# EAGLE board piggyback (EAGLE 6.5.0)
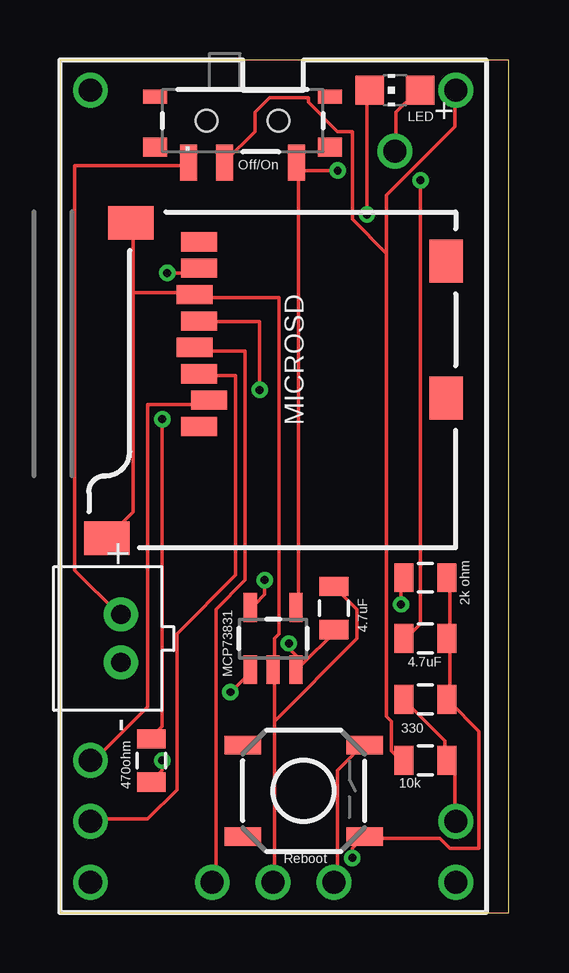
[diagram p0: board, top side]
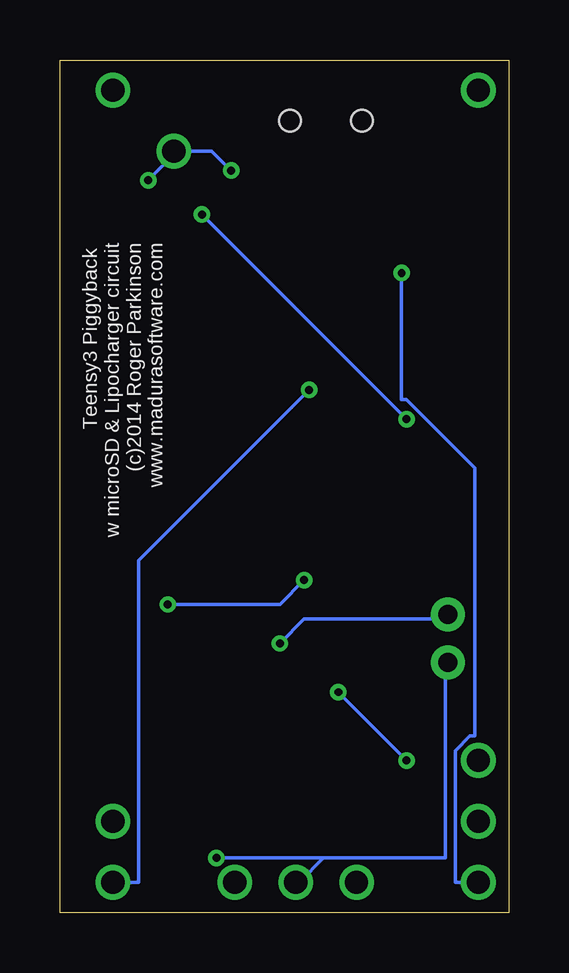
[diagram p1: board, bottom side, seen from below]

Size 18.72 x 35.55 mm. Coordinates in mm from the lower left corner, seen from the top.
Outline: 0,0 18.72,0 18.72,35.55 0,35.55 0,0
Copper layers (1*16): Top 0.0356mm / dielectric 1.5011mm / Bottom 0.0356mm
Design rules "LaenPCBOrder": minimum track width 6mil, minimum drill 13mil, track to track 6mil, track to pad 6mil, pad to pad 6mil, via to via 6mil, smd to smd 6mil, copper to edge 15mil, drill to drill 6mil, minimum pad ring 7mil, minimum via ring 7mil, stop-mask expansion 4mil, vias tented up to drill 0mil, thermal gap 10mil

## Footprints (pad centres in the part's own frame; a part is rotated, then mirrored left to right if it is on the bottom)
TEENSY_3.0+4-PIGGYBACK = drill 0.965: 3.3V1 -2.54,-16.51; 10 -7.62,-11.43; 11 -7.62,-13.97; 12 -7.62,-16.51; 13 7.62,-16.51; 14/A0 7.62,-13.97; GND -7.62,16.51; GND1 0,-16.51; PGM 2.54,-16.51; VIN 7.62,16.51; VUSB 5.08,13.97
0805 = smd 0.8 x 1.2: 1 -0.9,0; 2 0.9,0
JST-PH-2-THM = drill 0.8 pad 1.422: 1 1,0; 2 -1,0
CHIP-LED0805 = smd 1.2 x 1.2: A 0,-1.05; C 0,1.05
SOT23-5 = smd 0.55 x 1.2: 1 -0.95,-1.3; 2 0,-1.3; 3 0.95,-1.3; 4 0.95,1.3; 5 -0.95,1.3
MICRO-SD-SOCKET-PP = smd 0.8 x 1.5: 1 -8.94,10.7; 2 -7.84,10.3; 3 -6.74,10.7; 4 -5.64,10.9; 5 -4.54,10.7; 6 -3.44,10.9; 7 -2.34,10.7; 8 -1.24,10.7 | smd 1.8 x 1.4: CD1 -2.05,0.4; CD2 -7.75,0.4 | smd 1.4 x 1.9: GND1 -13.6,14.55; GND3 -0.45,13.55
TACTILE_SWITCH_SMD = smd 1.524 x 0.762: 1 -2.54,1.905; 2 2.54,1.905; 3 -2.54,-1.905; 4 2.54,-1.905
SWITCH-SPST-SMD-A = smd 0.7 x 1.5: 1 -2.25,-1.75; 2 -0.75,-1.75; 3 2.25,-1.75 | smd 1 x 0.6: GND1 -3.65,1; GND3 3.65,1 | smd 1 x 0.8: GND2 -3.65,-1.1; GND4 3.65,-1.1 | hole 0.9: -1.5,0; 1.5,0

## Placement (x,y rotation side)
.  TEENSY_3.0+4-PIGGYBACK  [TEENSY_3.0+4-PIGGYBACK]  8.89,17.78 0 top
C1  4.7uF  [0805]  11.43,12.7 90 top
C2  4.7uF  [0805]  15.24,11.43 0 top
CN1  Battery  [JST-PH-2-THM]  2.54,11.43 90 top
LED  LED  [CHIP-LED0805]  13.97,34.29 90 top
MCP73831  [SOT23-5]  8.89,11.43 0 top
MICROSD  USD-SOCKETNEW  [MICRO-SD-SOCKET-PP]  16.51,29.21 90 top
R1  470ohm  [0805]  3.81,6.35 270 top
R2  2k ohm  [0805]  15.24,13.97 0 top
R3  10k  [0805]  15.24,6.35 0 top
R5  330  [0805]  15.24,8.89 0 top
S1  Reboot  [TACTILE_SWITCH_SMD]  10.16,5.08 0 top
S3  Off/On  [SWITCH-SPST-SMD-A]  7.62,33.02 0 top

## Library data of the parts
. = Teensy3.0
C1 C2 MCP73831 R1 R2 = SparkFun
CN1 LED = adafruit
MICROSD = SparkFun-Connectors
R3 R5 = SparkFun-Resistors
S1 = SparkFun-Electromechanical; PROD_ID: SWCH-08247
S3 = SparkFun-Electromechanical

## Nets
DI: ..11 MICROSD.3
DO: ..12 MICROSD.7
GND: ..GND1 C1.2 C2.2 CN1.2 MCP73831.2 MICROSD.6 MICROSD.GND1 MICROSD.GND3 R2.2 R5.2 S1.4
N$1: MCP73831.5 R2.1
N$3: C1.1 CN1.1 MCP73831.3 S3.1
N$4: LED.C R1.1
N$5: MCP73831.1 R1.2
N$6: ..VUSB C2.1 LED.A MCP73831.4 S3.3
N$7: ..PGM S1.2
N$8: ..VIN R3.1 S3.2
N$9: ..3.3V1 MICROSD.4
N$10: ..14/A0 R3.2 R5.1
N$12: ..13 MICROSD.5
N$14: ..10 MICROSD.2

## Tracks (layer width: path | path; a pad name or v marks a point on that pad's centre or on a via)
DI
  Top 0.152: MICROSD.3 5.89,22.4 7.32,22.4 7.32,14.07 4.88,11.63 4.88,5.13 3.66,3.91 1.42,3.91 ..11
DO  (via drill 0.33)
  Top 0.152: v4.47,26.67 5.69,26.67 MICROSD.7
  Bottom 0.152: v4.47,26.67 4.47,21.39 4.27,21.39 1.42,18.54 1.42,7.37 1.63,7.37 2.23,6.76 2.23,1.27 ..12
GND  (via drill 0.33)
  Top 0.152: 3.05,25.86 5.49,25.86 MICROSD.6 5.69,25.65 9.14,25.65 9.14,11.63 8.94,11.43 8.94,10.21 MCP73831.2 8.94,10.01 8.94,7.98 | 3.05,25.86 3.05,28.7 MICROSD.GND3 | 3.05,25.86 3.05,16.71 2.03,15.7 MICROSD.GND1 | 16.26,11.43 16.26,8.99 R5.2 16.26,8.79 17.48,7.57 17.48,2.69 16.26,2.69 15.85,3.1 12.8,3.1 S1.4 12.6,3.1 12.19,2.69 v12.19,2.29 | 16.26,11.43 16.26,13.87 R2.2 | 16.26,11.43 C2.2 | 8.94,7.98 8.94,1.27 ..GND1 | 8.94,7.98 12.39,11.43 12.39,12.65 11.58,13.46 C1.2
  Bottom 0.152: 7.72,2.29 2.64,2.29 2.64,10.41 CN1.2 | 7.72,2.29 8.74,1.27 ..GND1 | 7.72,2.29 v12.19,2.29
N$1  (via drill 0.33)
  Top 0.152: v8.53,13.87 8.53,13.26 8.13,12.85 MCP73831.5 | v14.22,12.85 14.22,13.87 R2.1
  Bottom 0.152: v8.53,13.87 9.55,12.85 v14.22,12.85
N$3  (via drill 0.33)
  Top 0.152: 10.16,10.41 11.38,11.63 C1.1 | 10.16,10.41 9.96,10.21 MCP73831.3 | S3.1 5.28,31.14 0.61,31.14 0.61,14.27 2.44,12.45 CN1.1 | 10.16,10.41 9.55,11.02 v9.55,11.23
  Bottom 0.152: v9.55,11.23 8.53,12.24 2.64,12.24 CN1.1
N$4  (via drill 0.33)
  Top 0.152: v4.27,20.57 4.27,7.77 3.86,7.37 R1.1 | v12.8,29.11 12.8,34.19 LED.C
  Bottom 0.152: v12.8,29.11 v4.27,20.57
N$5  (via drill 0.33)
  Top 0.152: v4.27,6.35 4.27,5.94 3.86,5.54 R1.2 | v7.11,9.2 7.92,10.01 MCP73831.1
  Bottom 0.152: v7.11,9.2 v4.27,6.35
N$6  (via drill 0.33)
  Top 0.152: 9.96,30.94 9.96,31.14 S3.3 9.96,30.94 | 9.96,30.94 9.96,12.85 MCP73831.4 | v15.04,30.53 15.04,12.04 14.43,11.43 C2.1 | LED.A 14.83,34.19 14.02,33.38 14.02,31.75 ..VUSB | v11.58,30.94 9.96,30.94
  Bottom 0.152: 13.82,31.75 v15.04,30.53 | v11.58,30.94 12.39,31.75 13.82,31.75 | 13.82,31.75 ..VUSB
N$7
  Top 0.152: S1.2 12.6,6.96 11.58,5.94 11.58,1.27 ..PGM
N$8
  Top 0.152: 13.61,27.48 13.61,29.92 16.46,32.77 16.46,34.19 ..VIN | 13.61,27.48 13.61,8.18 13.82,7.98 13.82,6.76 14.22,6.35 R3.1 | 13.61,27.48 12.19,28.91 12.19,32.56 11.58,32.56 10.36,33.78 10.36,33.98 8.74,33.98 8.13,33.38 8.13,32.56 6.91,31.34 S3.2
N$9
  Top 0.152: MICROSD.4 5.69,23.42 7.72,23.42 7.72,13.87 6.5,12.65 6.5,1.27 ..3.3V1
N$10
  Top 0.152: ..14/A0 16.46,3.91 16.46,6.15 16.26,6.35 R3.2 16.05,6.35 16.05,7.16 14.43,8.79 R5.1
N$12  (via drill 0.33)
  Top 0.152: v8.33,21.79 8.33,24.64 5.89,24.64 MICROSD.5
  Bottom 0.152: v8.33,21.79 15.44,14.68 15.44,1.27 ..13
N$14
  Top 0.152: MICROSD.2 6.1,21.18 3.66,21.18 3.66,8.58 1.42,6.35 ..10

## Text on the board
bNames: Teensy3 Piggyback / w microSD & Lipocharger circuit / (c)2014 Roger Parkinson / www.madurasoftware.com